# Altium PCB Placa_Principal_PCB.PcbDoc
Units mm, origin at the board's own origin, x right, y up, seen from the top; angles counter-clockwise.
Board outline 152.4 x 101.6 mm, 2 copper layers (Top Layer, Bottom Layer); 13 components, 17 nets, 73 pads, 0 vias.
Unrouted connection lines stored in the file: 38.
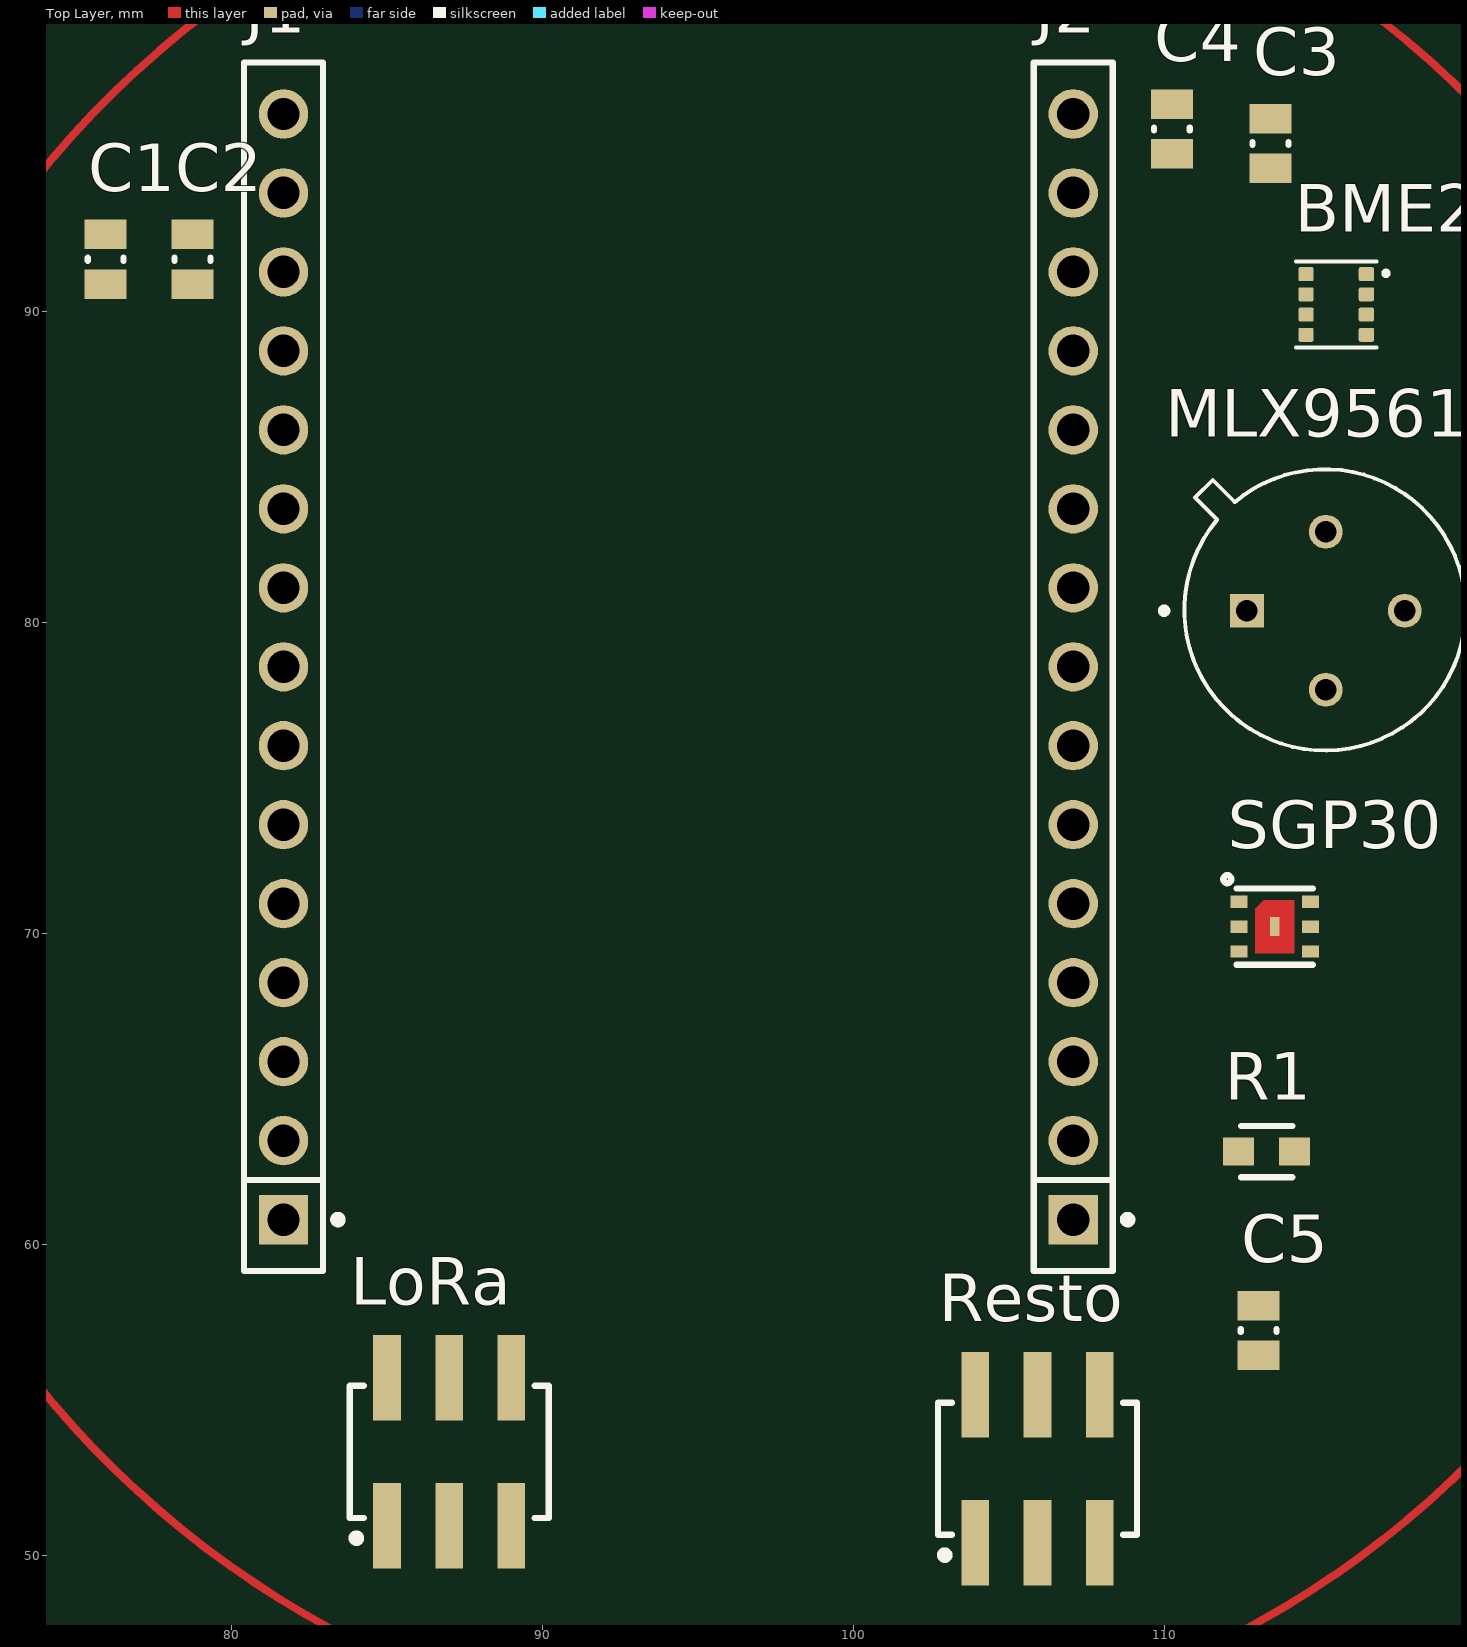
[diagram p0: Top Layer view]
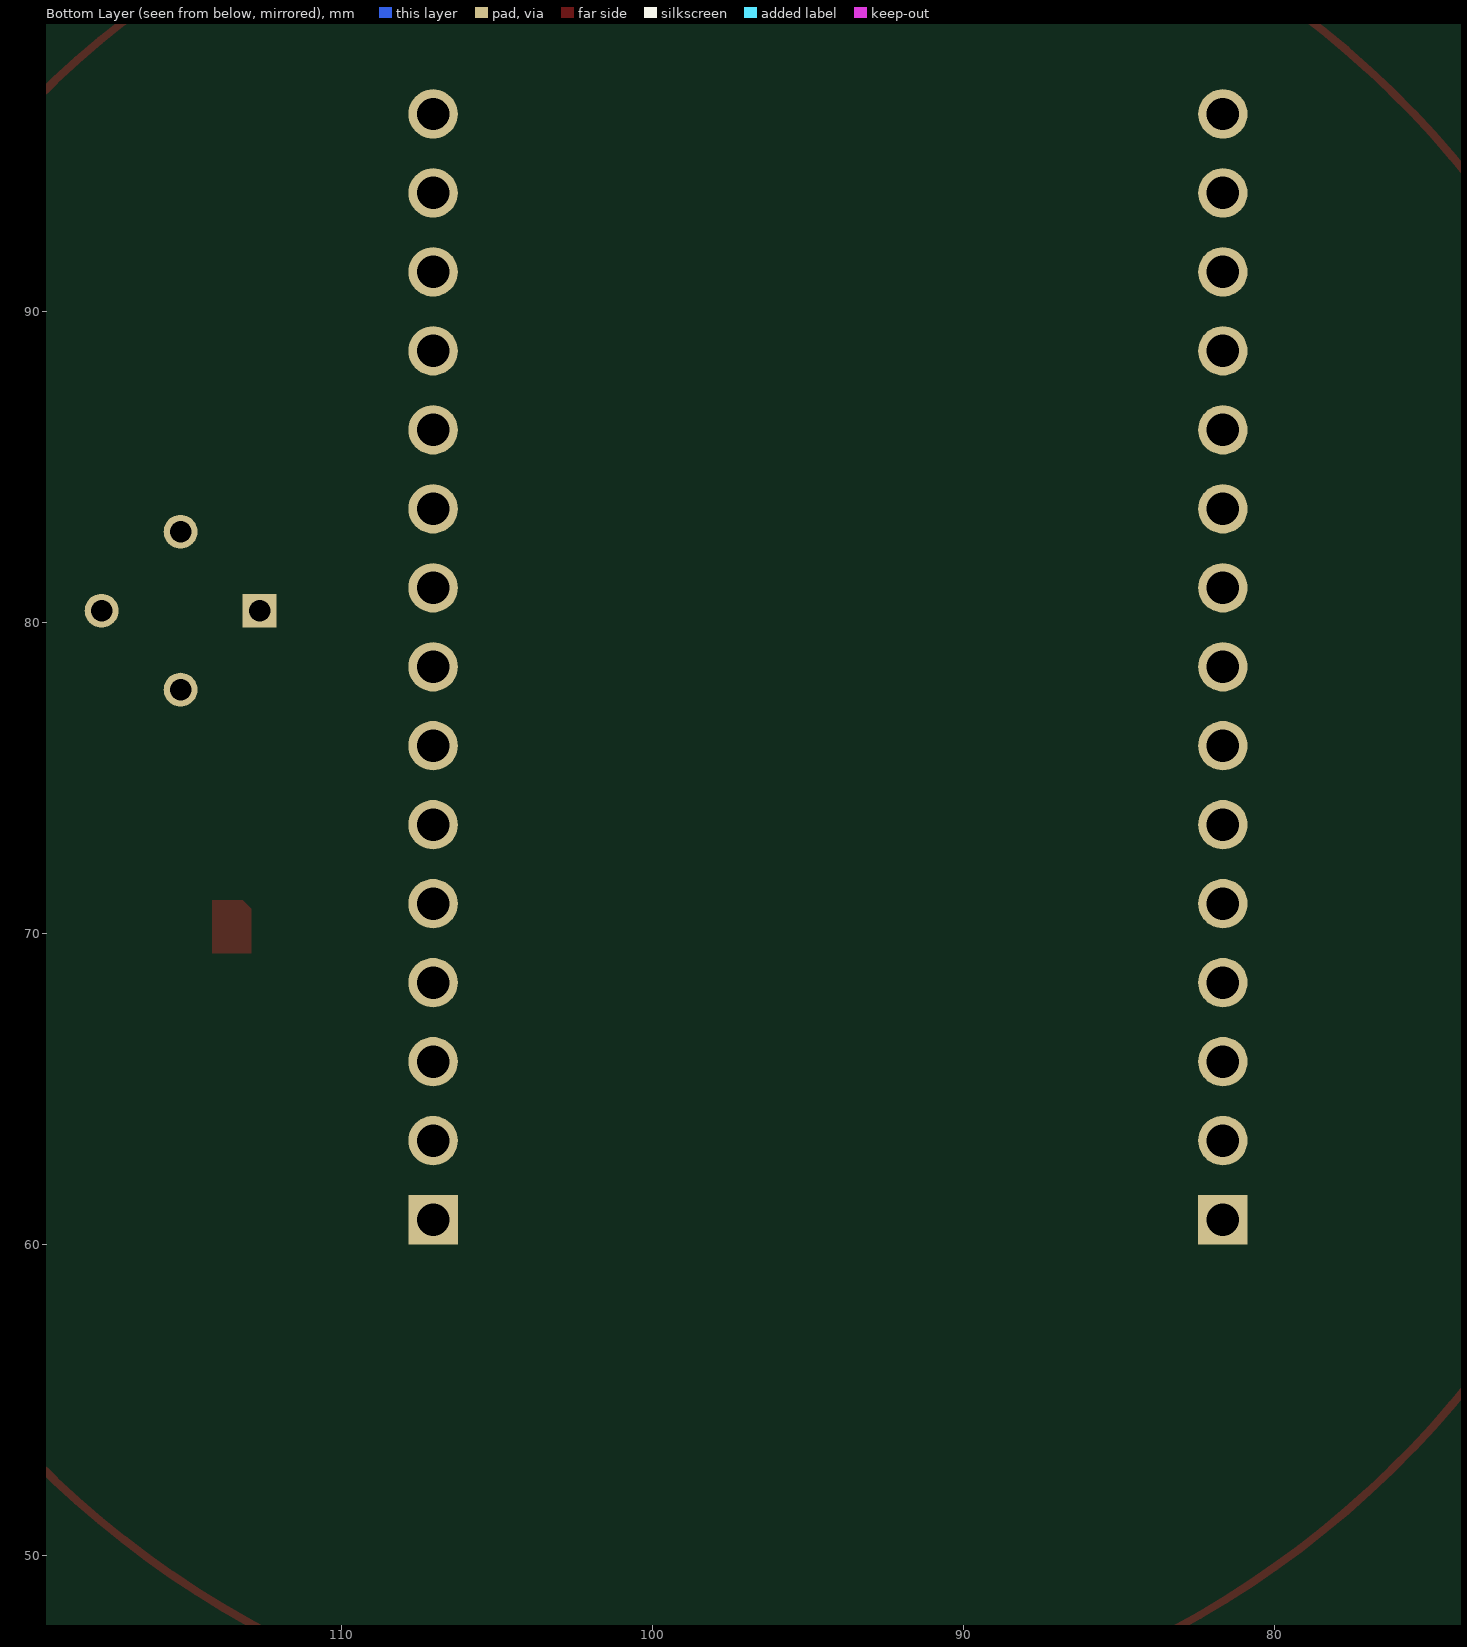
[diagram p1: Bottom Layer view, seen from below]

## Layer stack, top to bottom
Top Solder: solder mask 0.0102, Solder Resist, Dk 3.5
Top Layer: signal copper 0.0356
Dielectric 1: dielectric 0.32, FR-4, Dk 4.8
Bottom Layer: signal copper 0.0356
Bottom Solder: solder mask 0.0102, Solder Resist, Dk 3.5

## Board outline
25.4,25.4 177.8,25.4 177.8,127 25.4,127

## Design rules (kind name [scope] priority, off if disabled: settings)
Clearance [All] p1: gap=0.254 ignorepadtopadclearanceinfootprint=FALSE
PolygonConnect [All] p1: connectstyle=Relief reliefconductorwidth=0.254 reliefentries=4 polygonreliefangle="90 Angle" airgapwidth=0.254
RoutingVias [All] p1: holewidth=0.711 width=1.27 viastyle="Through Hole" minholewidth=0.711 minwidth=1.27 maxholewidth=0.711 maxwidth=1.27
SolderMaskExpansion [All] p1: expansion=0 istentingtop=FALSE
SupplyNets "Schematic Supply Nets_1" [InNet('GND')] p1: voltage=0.000
SupplyNets "Schematic Supply Nets" [InNet('+3.3V')] p2: voltage=0.000
Width [All] p1: maxlimit=0.254 minlimit=0.254 preferedwidth=0.254
30 further rules are at their usual default settings.

## Components (designator, comment, footprint, x,y, rotation, side; value= is the part's Value field where it differs from the comment)
BME280 "Comment" PSON65P250X250X100-8N 115.524,90.241 r0 top
C1 "100nF" CAPC0805(2012)100_L 75.946,91.694 r90 top value=160pF
C2 "0.1uF" CAPC0805(2012)100_L 78.74,91.694 r90 top value=160pF
C3 "100nF" CAPC0805(2012)100_L 113.411,95.415 r90 top value=160pF
C4 "0.1uF" CAPC0805(2012)100_L 110.236,95.885 r90 top value=160pF
C5 "100nF" CAPC0805(2012)100_L 113.03,57.239 r90 top value=160pF
J1 "SSW-115-01-T-S" FP-SSW-115-01-T-S-MFG 81.667,78.588 r90 top
J2 "SSW-115-01-T-S" FP-SSW-115-01-T-S-MFG 107.067,78.588 r90 top
LoRa "621006245821" 621006245821 86.995,53.34 r0 top
MLX95614 "Comment" TO254P942H425-4 115.189,80.391 r0 top
R1 "10k" FP-CPF0603-MFG 113.284,62.992 r0 top value=10KΩ
Resto "621006245821" 621006245821 105.918,52.794 r0 top
SGP30 "Comment" SGP30 113.545,70.231 r0 top

## Footprints (in the part's own frame and the unit in brackets; to place one, negate y for a bottom-side part, rotate by r counter-clockwise, add the part's x,y. Pads: shape width x height; smd on the part's side, far side on the other; paste and mask are expansions set on the pad)
621006245821 [mm] "Pin Header, pitch 2.00 mm, SMD, Vertical, dual row, 6p"
  rect 0.89x2.75 smd: 1(-2,-2.375) 2(-2,2.375) 3(0,-2.375) 4(0,2.375) 5(2,-2.375) 6(2,2.375)
  silkscreen extent -3.2,-2.9 3.2,2.12, body extent -3,-3.1 3,3.1, height 4.7
CAPC0805(2012)100_L [mm] "Chip Capacitor, Body 2.0x1.2mm, Height 1.0mm, IPC High Density"
  rect 0.95x1.35 smd: 1(-0.8,0) 2(0.8,0)
  silkscreen extent -0.05,-0.58 0.05,0.58, body extent -1.1,-0.72 1.1,0.72, height 1
FP-CPF0603-MFG [mm]
  rect 1x0.9 smd paste+0 mask+0: 1(-0.9,0) 2(0.9,0)
  silkscreen extent -0.82,-0.82 0.82,0.82, body extent -1.5,-0.55 1.5,0.55, height 0.25
FP-SSW-115-01-T-S-MFG [mm]
  rect 1.59x1.59 hole 1.04 paste-2539.97 mask+0: 1(-17.78,0)
  round 1.59 hole 1.04 paste-2539.97 mask+0: 2(-15.24,0) 3(-12.7,0) 4(-10.16,0) 5(-7.62,0) 6(-5.08,0) 7(-2.54,0) 8(0,0) 9(2.54,0) 10(5.08,0) 11(7.62,0) 12(10.16,0) 13(12.7,0) 14(15.24,0) 15(17.78,0)
  silkscreen extent -19.43,-1.88 19.43,1.27, body extent -19.53,-1.37 19.53,1.37, height 0.25
PSON65P250X250X100-8N [mm]
  rrect25% 0.49x0.45 smd paste+0 mask+0.102: 1(0.97,0.975) 2(0.97,0.325) 3(0.97,-0.325) 4(0.97,-0.975) 5(-0.97,-0.975) 6(-0.97,-0.325) 7(-0.97,0.325) 8(-0.97,0.975)
  silkscreen extent -1.3,-1.39 1.65,1.39, body extent -1.25,-1.25 1.25,1.25, height 1
SGP30 [mm]
  rect 0.55x0.4 smd paste-1 mask+0.102: 1(-1.15,0.8) 2(-1.15,0) 3(-1.15,-0.8) 4(1.15,-0.8) 5(1.15,0) 6(1.15,0.8)
  rect 0.305x0.61 smd paste-1 mask+0: DIEPAD(0,0)
  Top Layer region: 0.625,-0.85 -0.625,-0.85 -0.625,0.575 -0.35,0.85 0.625,0.85
  silkscreen extent -1.65,-1.22 1.22,1.65
TO254P942H425-4 [mm]
  rect 1.09x1.09 / inner round 1.09 / far side rect 1.09x1.09 hole 0.69: 1(-2.54,0)
  round 1.09 hole 0.69: 2(0,-2.54) 3(2.54,0) 4(0,2.54)
  silkscreen extent -5.3,-4.5 4.5,4.55, body extent -4.56,-4.56 4.56,4.56, height 4.25

## Part data
BME280: library part BME280, "Board Mount Humidity Sensors MEMS humidity, pressure and temperature sensor", Package="LGA-8 Bosch", Check_prices=https://www.snapeda.com/parts/BME280/Bosch/view-part/?ref=eda, MF=Bosch, MP=BME280, SnapEDA_Link=https://www.snapeda.com/parts/BME280/Bosch/view-part/?ref=snap
C1 C2 C3 C4 C5: library part CMP-1036-02183-1, "CAP 160pF 100V ±5% 0805 (2012 Metric) Thickness 1mm SMD", Case-EIA=0805, Case-Metric=2012, Rated Voltage="100 V", Tolerance=Â±5%, Max Thickness="1 mm", Technology=SMT
J1 J2: library part CMP-02766-001723-1, "CONN RCPT 15POS 0.1 TIN PCB", Color=Black, Contact Resistance=10mR, Max Current Rating=6.9A, Max Operating Temperature=105°C, Max Voltage Rating (AC)=550V, Min Operating Temperature=-55°C, Connector Type=Receptacle, Contact Material=Bronze, Contact Plating=Tin, Contact Type="Female Socket", Depth=2.41mm, Gender=Receptacle, Housing Color=Black, Housing Material=Polymer, Lead Free="Lead Free", Length=38.61mm, Mating Cycles=100, Mount="Through Hole", Number of Contacts=15, Number of Positions=15, Number of Rows=1, Orientation=Straight, packaging=Bulk, Pitch=0.1inch, Radiation Hardening=No, REACH SVHC="No SVHC", RoHS Compliant=Yes, Series=SSW, Termination=Solder, Width=2.41mm
LoRa Resto: library part CMP-1502-00996-4, "SMT Vertical Pin Header WR-PHD, Pitch 2.00 mm, Dual Row, 6 pins", Contact Resistance=20mΩ, Current Rating=2A, Operating Supply Voltage=200V, Gender=Male, Lead Pitch=2mm, Number of Pins=6, Orientation=Vertical, RoHS=Non-Compliant
MLX95614: library part MLX90614ESF-BAA-000-TU, "single pixel, 3V, standard acc., 90deg FOV", Package="TO-39-4 Melexis", Check_prices=https://www.snapeda.com/parts/MLX90614ESF-BAA-000-TU/Melexis/view-part/?ref=eda, MF=Melexis, MP=MLX90614ESF-BAA-000-TU, SnapEDA_Link=https://www.snapeda.com/parts/MLX90614ESF-BAA-000-TU/Melexis/view-part/?ref=snap
R1: library part CMP-03211-003506-1, "RES SMD 10KΩ 0.5% 1/16W 0603", Manufacturer="TE Connectivity", Manufacturer Part Number=CPF0603D10KE, Package=CPF0603, Power Rating=0.063W, Resistance=10KΩ, Temperature="-55°C to +155°C", Temperature Coefficient=25ppm/°C, Temperature Range High=+155°C, Temperature Range Low=-55°C, Tolerance=0.5%, Voltage Rating=50V, Automotive=No, Category=Res, ComponentLink2Description=Datasheet, ComponentLink2URL=https://www.te.com/commerce/DocumentDelivery/DDEController?Action=showdoc&DocId=Data+Sheet%7F1773200%7FM%7Fpdf%7FEnglish%7FENG_DS_1773200_M.pdf%7F3-1676481-2, Composition="Thin Film", Device Class L1="Passive Components", Device Class L2=Resistors, Device Class L3="Chip SMD Resistors", Height=0.55mm, Ipc Land Pattern Name=RESC15580X45, Lead Free=Yes, Octopart=https://octopart.com/cpf0603d10ke-te+connectivity-22737789, octopart_url=https://octopart.com/cpf0603d10ke-te+connectivity-22737789, packaging="5k Reel", RoHS=TRUE, Series=CPF
SGP30: library part SGP

## Nets (pads, with @x,y where several pads share a name; then routed paths per layer and width w, separated by ;. In a path a pad name is that pad's centre, name@x,y a point inside that pad or via, vN(x,y) a via of type N, cw(c..) or ccw(c..) an arc to the next point about the centre after c; other vN are vias at no path point)
+3.3V: BME280.2 C1.2 C2.2 C3.2 C4.2 J1.1 J2.1 MLX95614.4 R1.2 SGP30.1
Buzzer: J2.8 Resto.2
"CS MicoSD": J2.3 Resto.5
"DIO0 LoRa": J2.7 LoRa.4
GND: BME280.4 C1.1 C2.1 C3.1 C4.1 C5.1 J1.2 J2.2 MLX95614.3 SGP30.2
GPS_RX: J1.7 Resto.3
GPS_TX: J1.6 Resto.1
"MISO SPI": J1.10 LoRa.5
MonitorB: J2.12 Resto.6
"MOSI SPI": J1.15 LoRa.2
"MPU6050 INT": J2.6 Resto.4
NetC5_2: C5.2 J2.15 R1.1
"NSS LoRa": J1.8 LoRa.1
"RST LoRa": J2.5 LoRa.6
"SCK SPI": J1.9 LoRa.3
SCL: BME280.3 J2.10 MLX95614.2 SGP30.6
SDA: BME280.5 J2.9 MLX95614.1 SGP30.3
pads on no net: BME280.1 BME280.6 BME280.7 BME280.8 J1.3 J1.4 J1.5 J1.11 J1.12 J1.13 J1.14 J2.4 J2.11 J2.13 J2.14 SGP30.4 SGP30.5 SGP30.DIEPAD
copper on no net: | length 194.8
  Top Layer w0.254: 128.917,74.93 ccw(c97.917,74.93) 128.917,74.93